# Altium PCB PCB_MCH_mordovia.PcbDoc
Units mil, origin at the board's own origin, x right, y up, seen from the top; angles counter-clockwise.
Board outline 2362.2 x 2759.84 mil, 4 copper layers (Top Layer, InternalPlane1, InternalPlane4, Bottom Layer), stack 28.032 mil thick; 8 components, 128 nets, 235 pads, 27 vias.
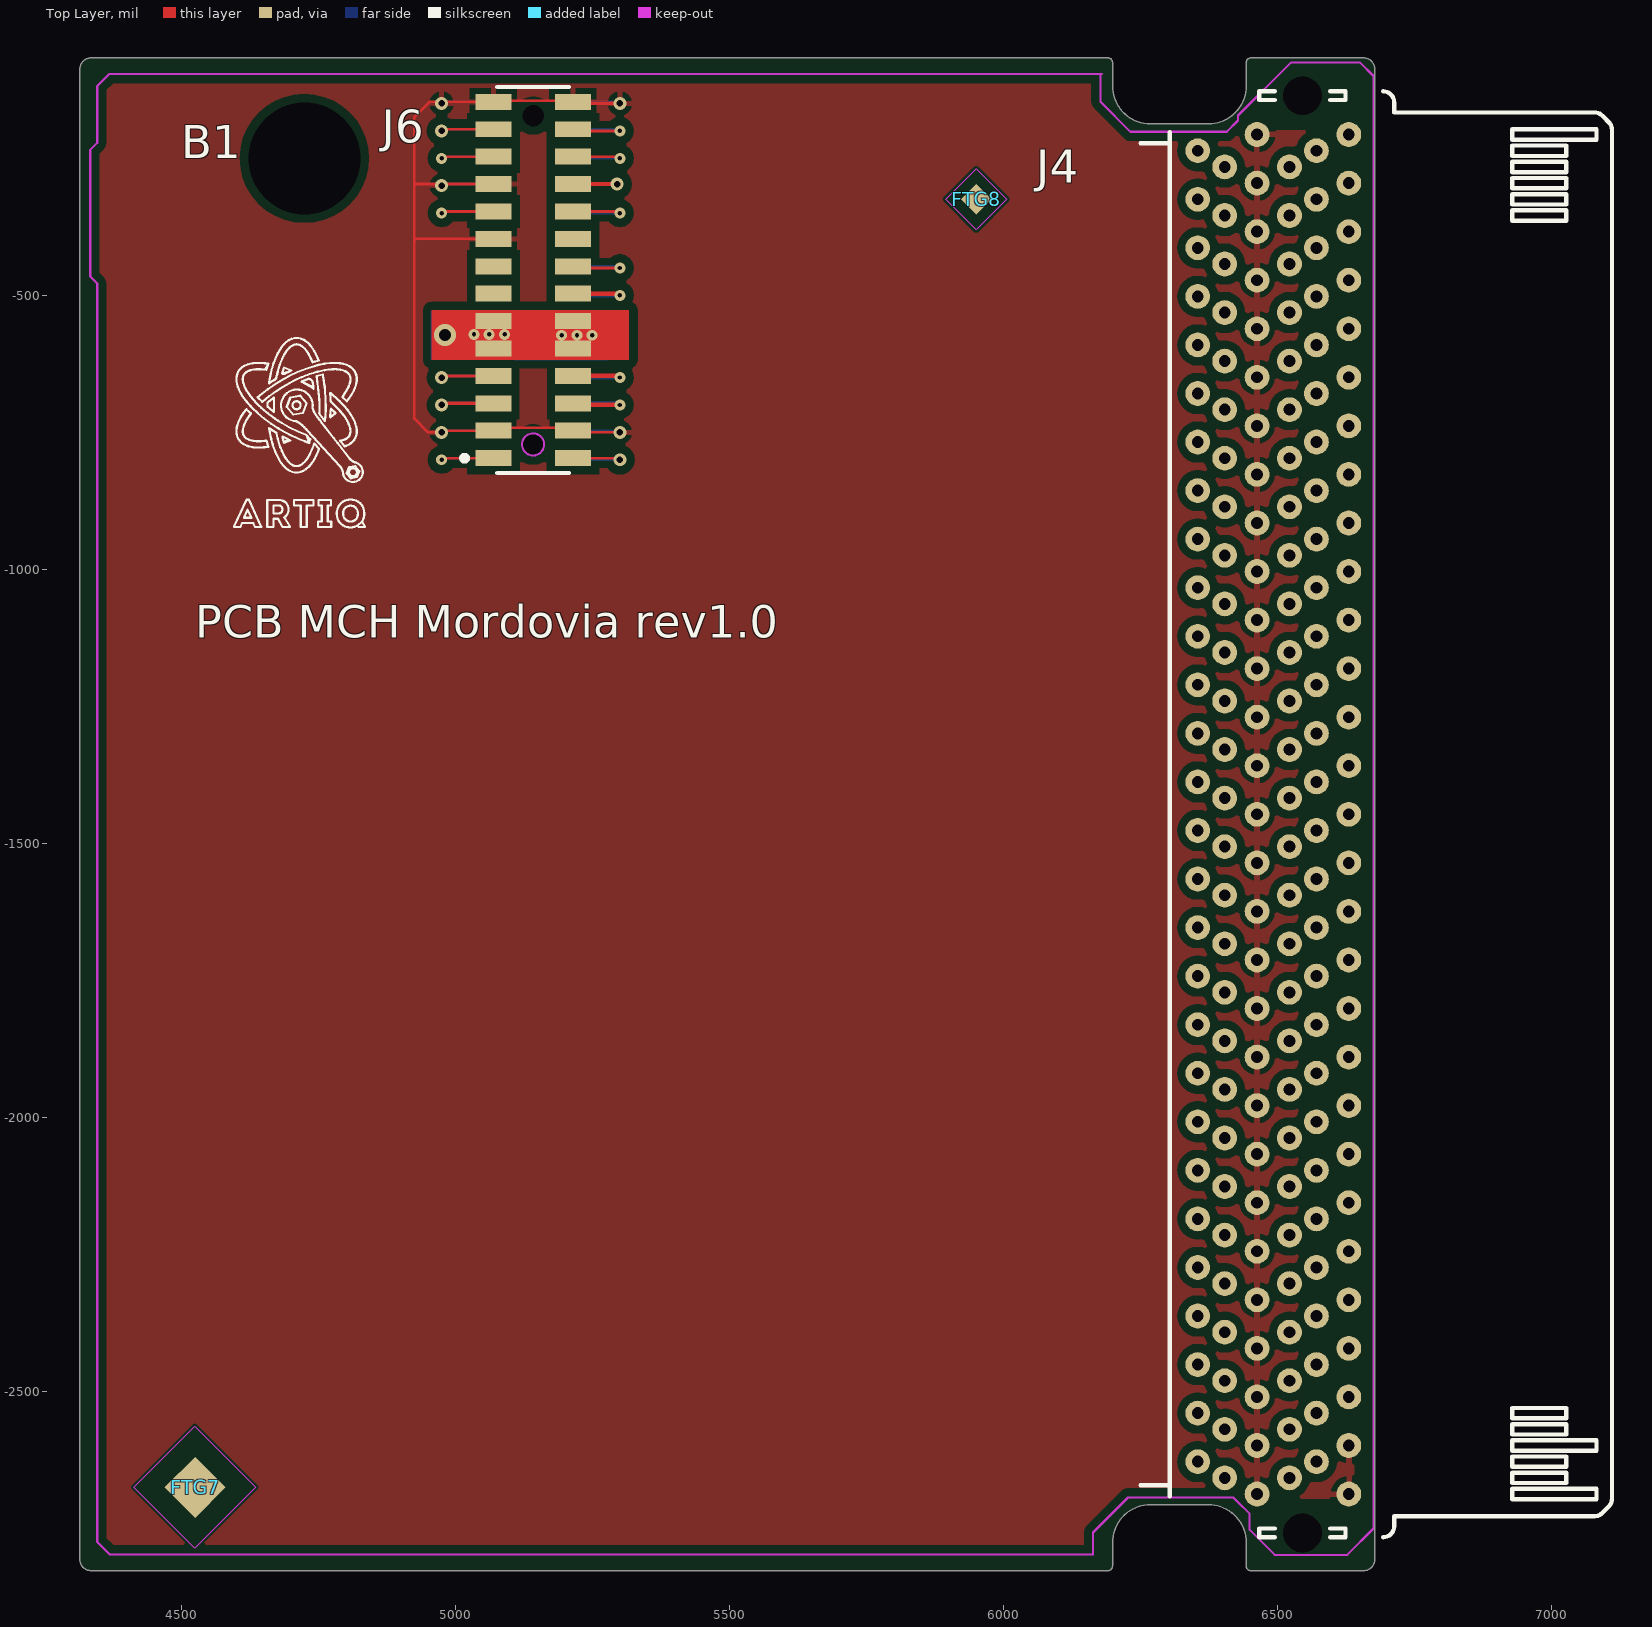
[diagram p0: Top Layer view]
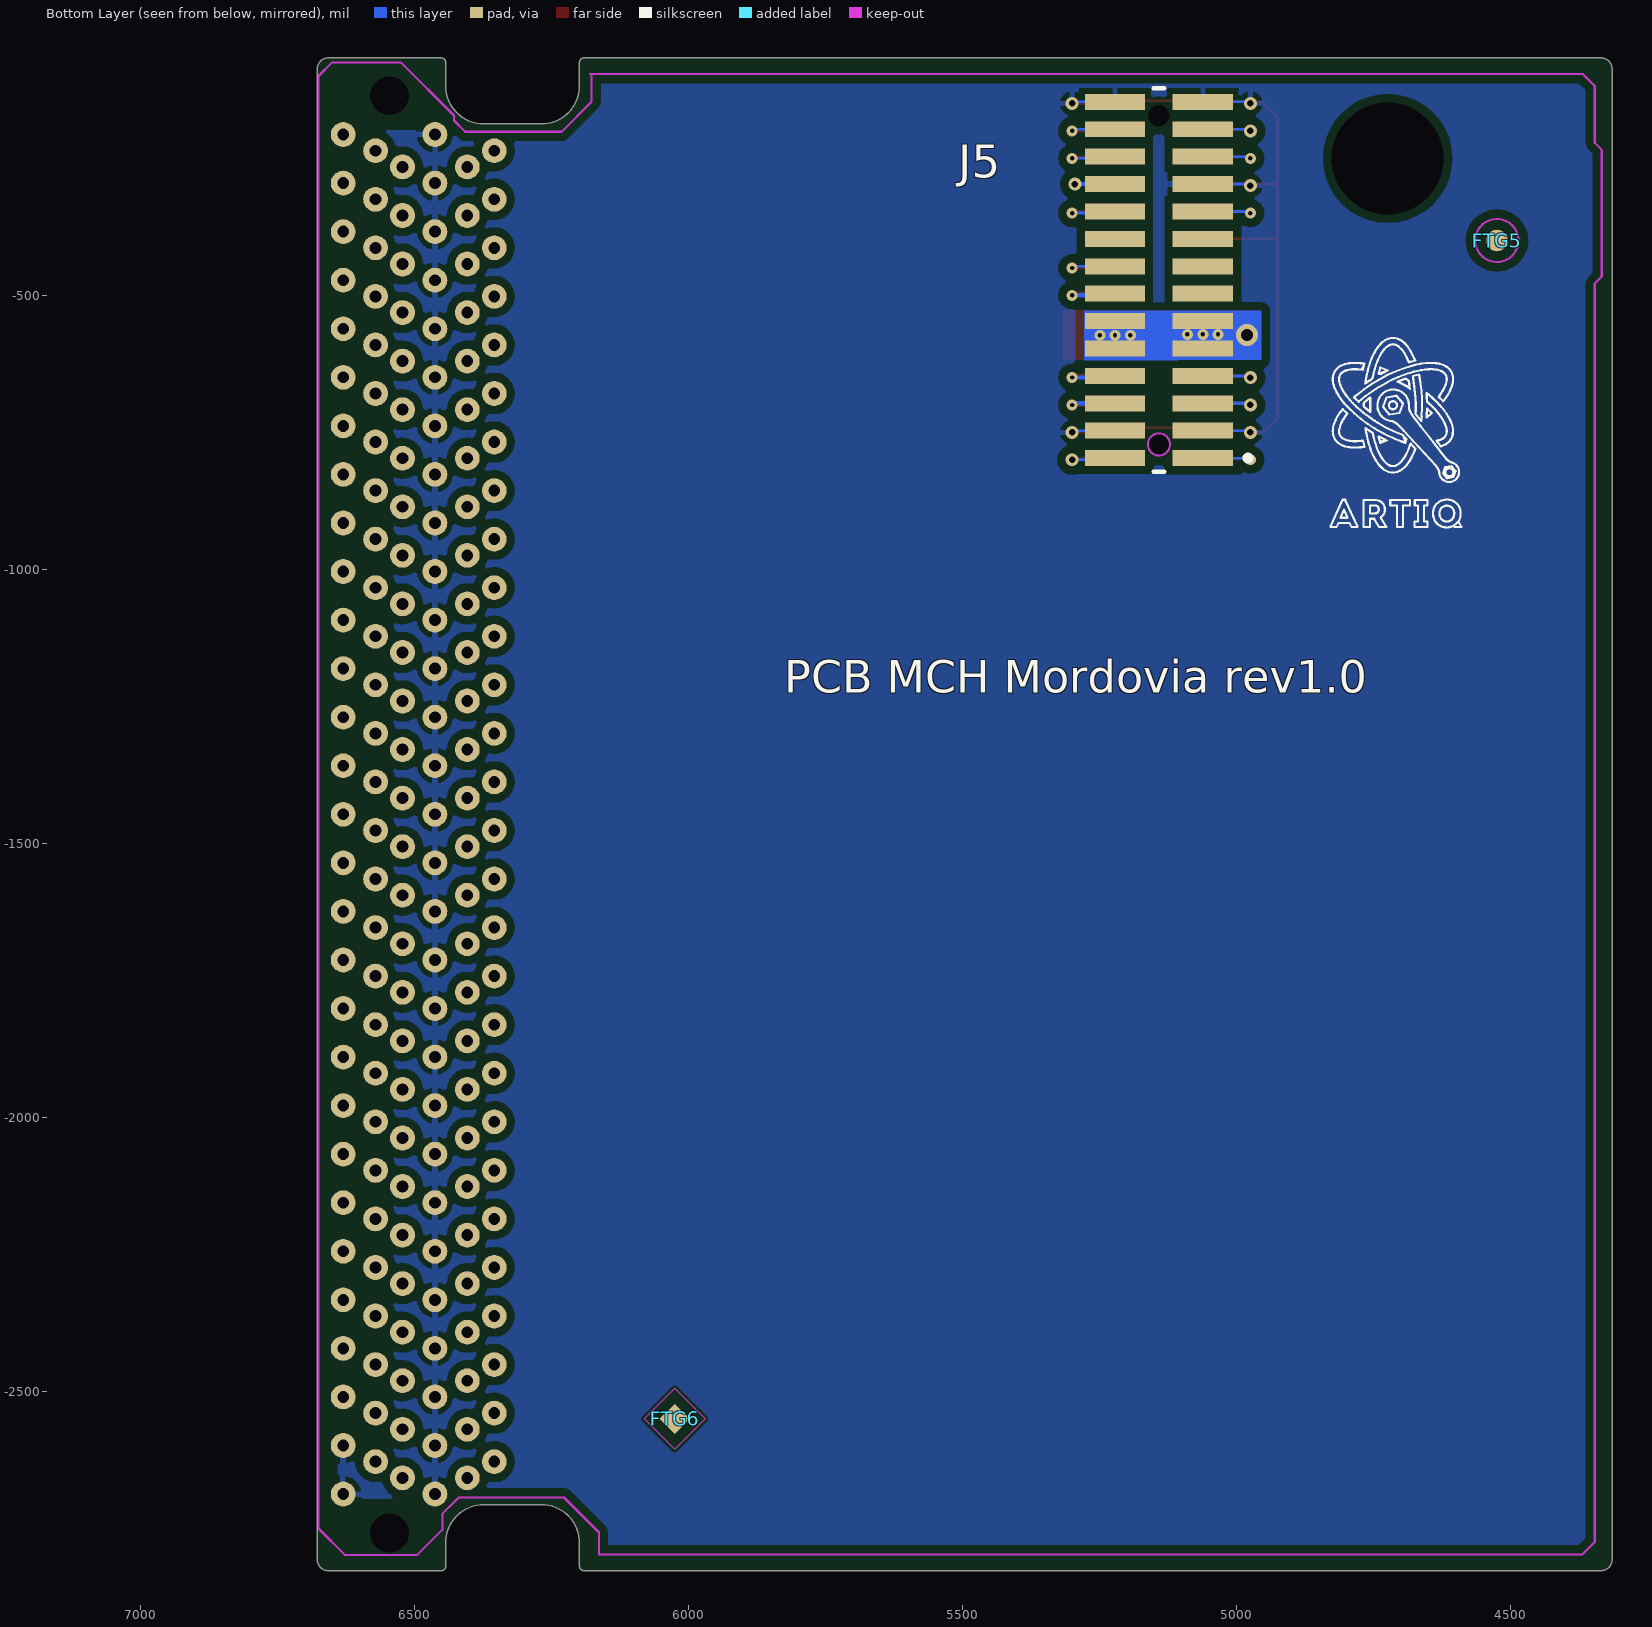
[diagram p1: Bottom Layer view, seen from below]
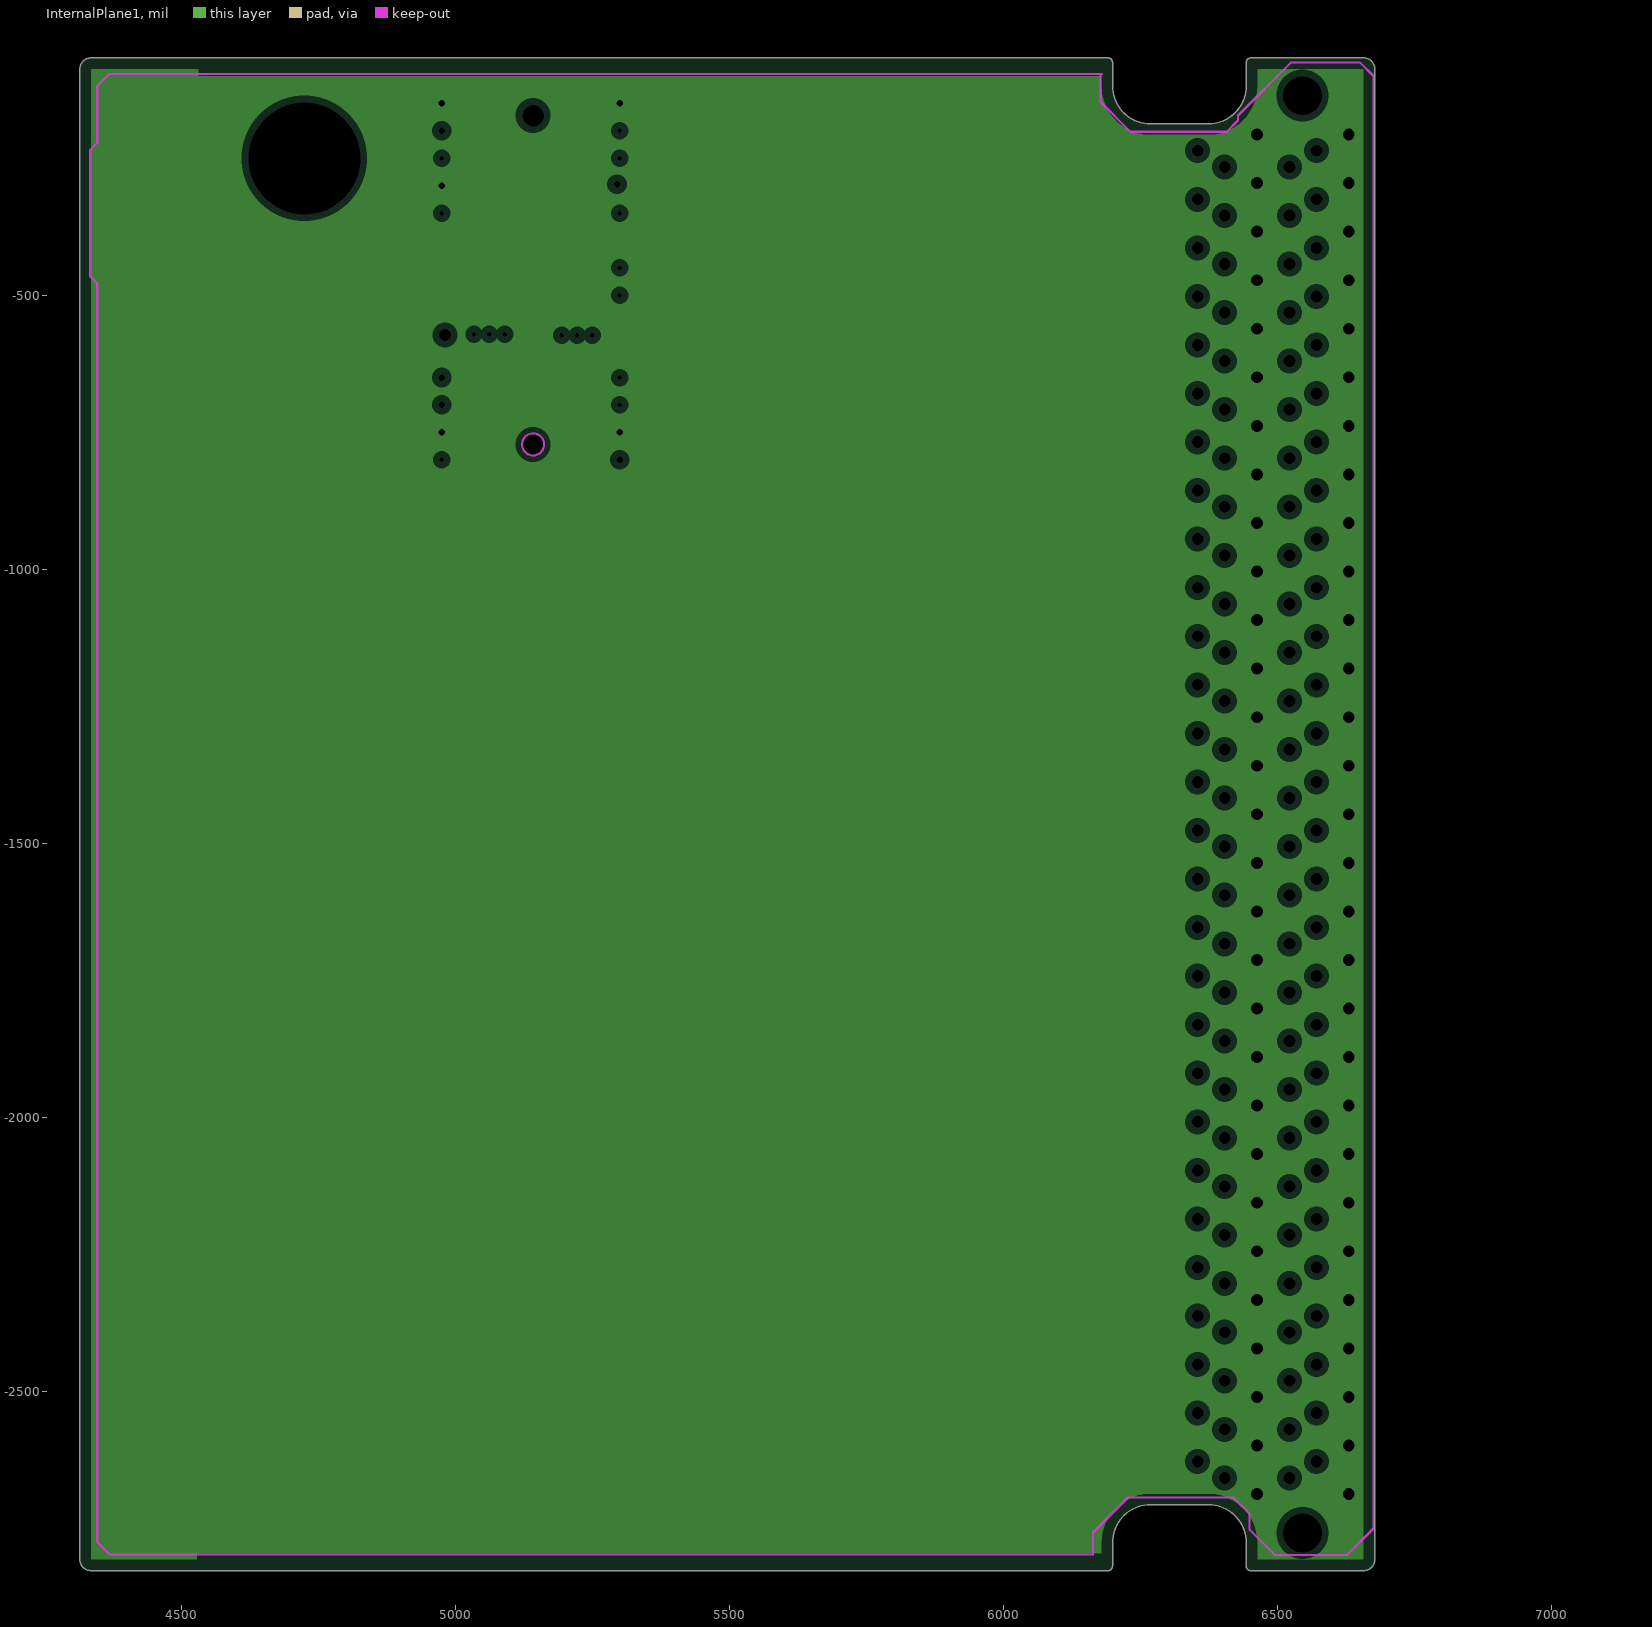
[diagram p2: InternalPlane1, clearances drawn from the general rule]
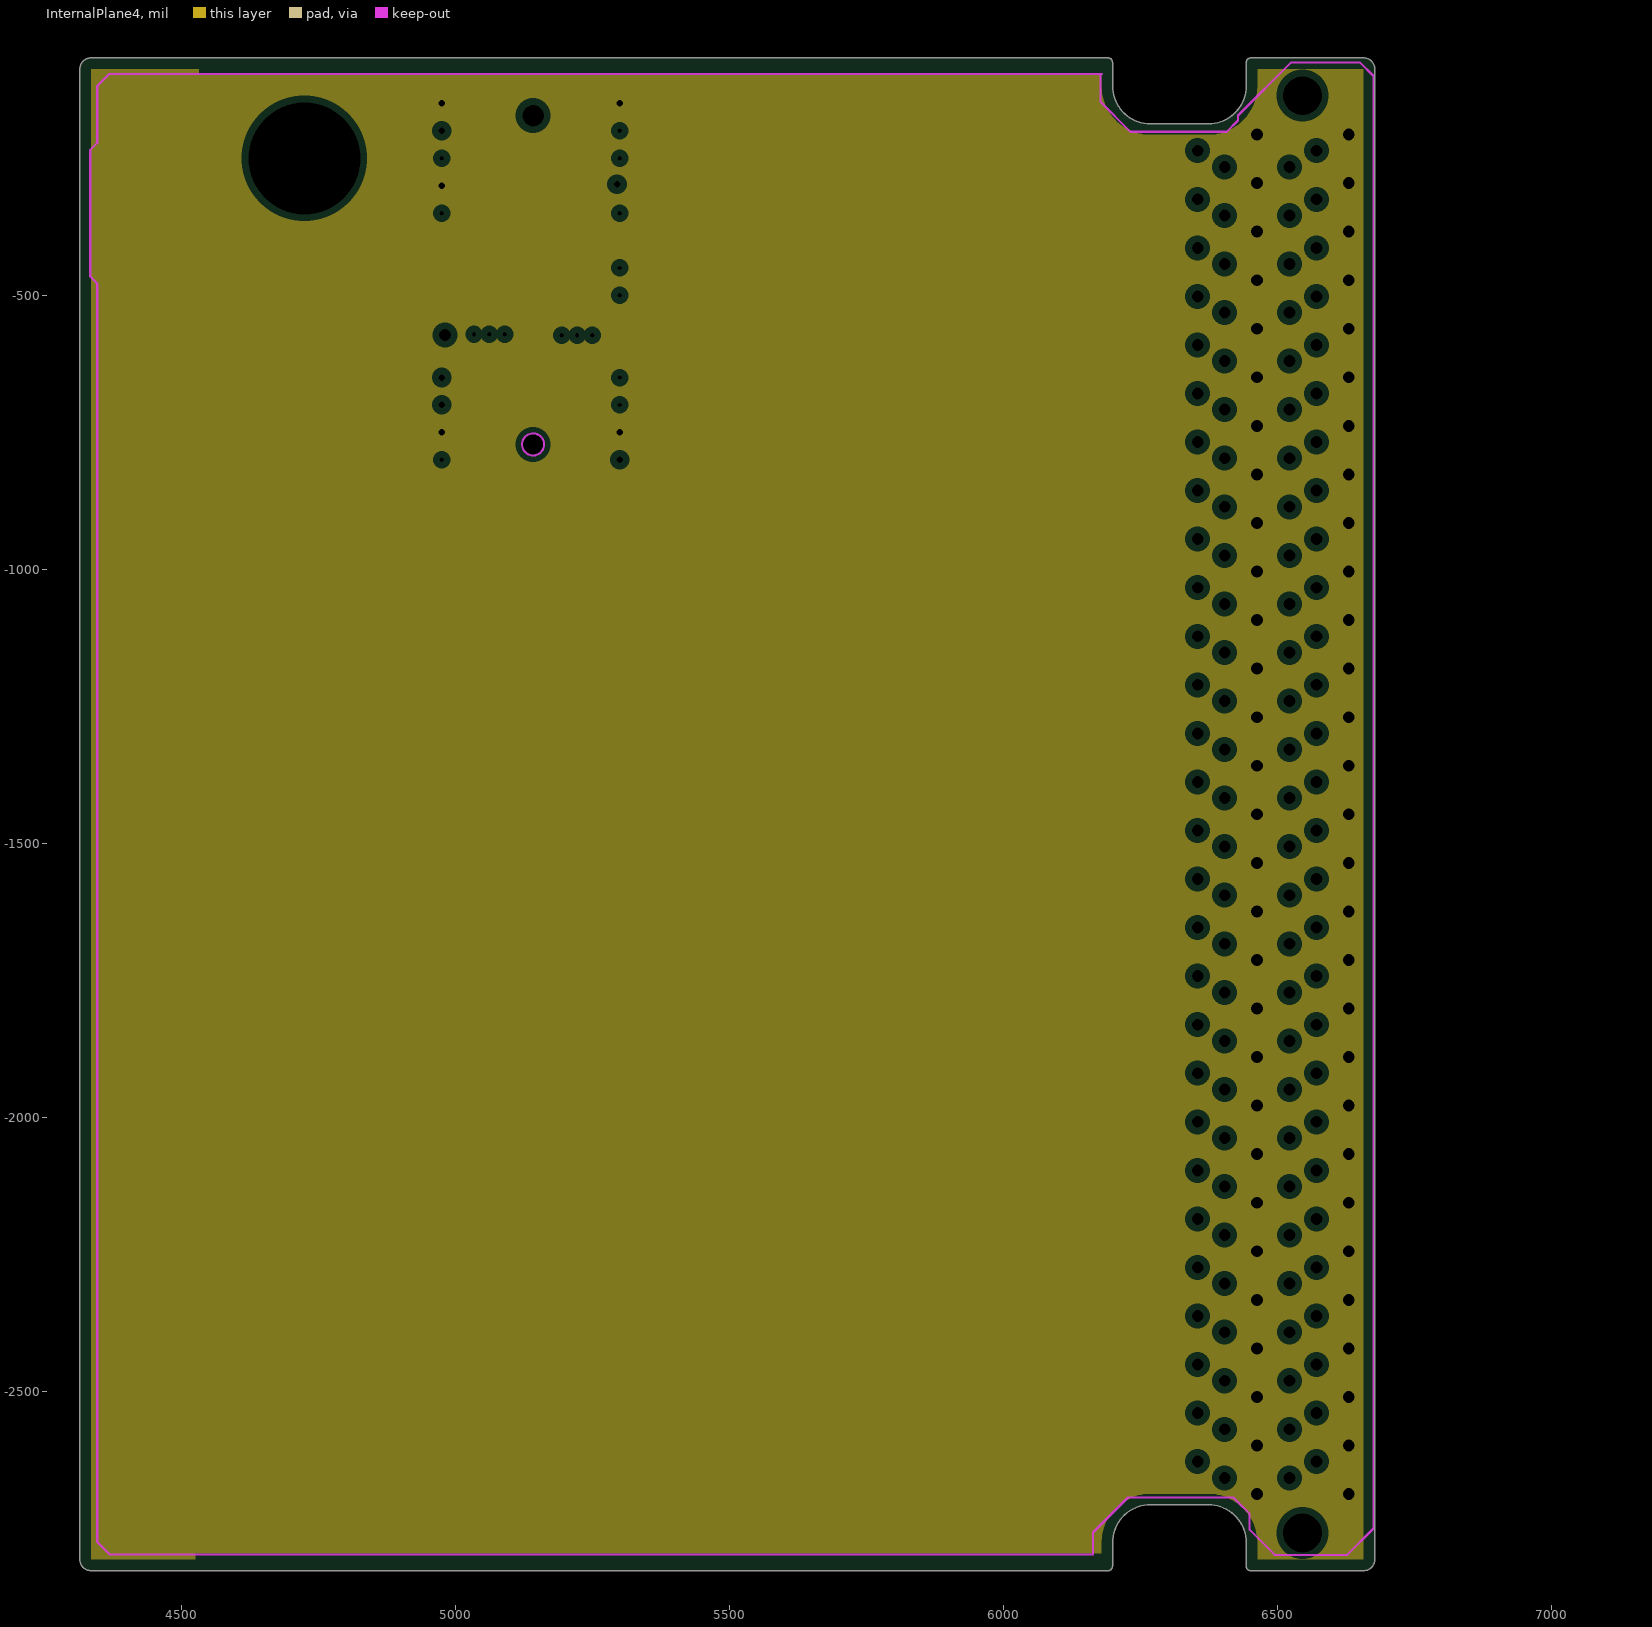
[diagram p3: InternalPlane4, clearances drawn from the general rule]

## Layer stack, top to bottom
Top Solder: solder mask 0.4, Solder Resist, Dk 3.5
Top Layer: signal copper 1.378
Dielectric1: core 9.2913, FR-4, Dk 4.5
InternalPlane1: plane copper 1.378, net GND
Dielectric5: prepreg 3.937, FR-4, Dk 4.5
InternalPlane4: plane copper 1.378, net GND
Dielectric6: core 9.2913, FR-4, Dk 4.8
Bottom Layer: signal copper 1.378
Bottom Solder: solder mask 0.4, Solder Resist, Dk 3.5

## Board outline
4334.65,-2826.77 6190.94,-2826.77 ccw(c6190.94,-2818.9) 6198.82,-2818.9 6198.82,-2775.59 cw(c6267.72,-2775.59) 6267.72,-2706.69 6374.02,-2706.69 cw(c6374.02,-2775.59) 6442.91,-2775.59 6442.91,-2818.9 ccw(c6450.79,-2818.9) 6450.79,-2826.77 6657.48,-2826.77 ccw(c6657.48,-2807.09) 6677.17,-2807.09 6677.17,-86.61 ccw(c6657.48,-86.61) 6657.48,-66.93 6450.79,-66.93 ccw(c6450.79,-74.8) 6442.91,-74.8 6442.91,-118.11 cw(c6374.02,-118.11) 6374.02,-187.01 6267.72,-187.01 cw(c6267.72,-118.11) 6198.82,-118.11 6198.83,-74.8 6198.82,-74.8 ccw(c6190.94,-74.8) 6190.94,-66.93 4334.65,-66.93 ccw(c4334.65,-86.61) 4314.96,-86.61 4314.96,-2807.09 ccw(c4334.65,-2807.09)

## Design rules (kind name [scope] priority, off if disabled: settings)
Clearance Clearance_Diff [InNetClass('diff_all') vs InNetClass('diff_all')] p1: gap=4.13
Clearance [All] p2: gap=5 except(15: Arc-Poly Track-Poly SMDPad-Poly THPad-Poly Via-Poly Fill-Poly Poly-Poly)
ComponentClearance [All] p1 off: gap=10 collisioncheckmode=3 verticalgap=10 showdistances=FALSE
DiffPairsRouting [IsDifferentialPair] p1: maxlimit=4.13 minlimit=4.13 mostfreqgap=4.13 toplayer_minwidth=15 toplayer_maxwidth=15 toplayer_prefwidth=15 bottomlayer_minwidth=15 bottomlayer_maxwidth=15 bottomlayer_prefwidth=15 maxuncoupledlength=900
FabricationTestPointUsage TestPointUsage [All] p1 off: valid=0 allowmultiple=FALSE
FabricationTestpoint Testpoint [All] p1 off: side=3 testpointundercomponent=TRUE minsize=40 maxsize=100 preferedsize=60 minholesize=0 maxholesize=40 preferedholesize=32 testpointgrid=1 allowsidetop=TRUE allowsidebottom=TRUE usegrid=TRUE gridtolerance=0.01
HoleSize [All] p1: absolutevalues=TRUE maxlimit=196.85 minlimit=7.87 maxpercent=80.000 minpercent=20.000
PlaneClearance PlaneClearance_CON1 [InComponent('CON1')] p1: clearance=15
PlaneClearance PlaneClearance_Via20mil [((viasize < 21) and (viasize > 19))] p2: clearance=10
PlaneClearance [All] p3: clearance=12
PlaneConnect PlaneConnect_CON1 [InComponent('CON1')] p1: planeconnectstyle=Relief reliefexpansion=10 reliefentries=4 reliefconductorwidth=8 reliefairgap=8
PlaneConnect PlaneConnect_Via26mil [((viasize < 27) and (viasize > 25))] p2: planeconnectstyle=Relief reliefexpansion=8 reliefentries=4 reliefconductorwidth=6 reliefairgap=5
PlaneConnect PlaneConnect_Via40mil [viasize=40] p3: planeconnectstyle=Direct reliefexpansion=20 reliefentries=4 reliefconductorwidth=10 reliefairgap=10
PlaneConnect PlaneConnect_Via20mil [((viasize < 21) and (viasize > 19))] p4: planeconnectstyle=Relief reliefexpansion=7 reliefentries=4 reliefconductorwidth=6 reliefairgap=5
PlaneConnect [All] p5: planeconnectstyle=Relief reliefexpansion=15 reliefentries=4 reliefconductorwidth=10 reliefairgap=10
PolygonConnect PolygonConnect_Power [InNetClass('Power')] p1: connectstyle=Direct reliefconductorwidth=10 reliefentries=4 polygonreliefangle="90 Angle" airgapwidth=10
PolygonConnect [All] p2: connectstyle=Relief reliefconductorwidth=10 reliefentries=4 polygonreliefangle="90 Angle" airgapwidth=10
RoomDefinition PCB_MCH_mordovia [InComponentClass('PCB_MCH_mordovia')] p1: confinementstyle=ConfineIn formatcopy=TRUE lockcomponents=FALSE outline 4609.7,-2119 4429,-2119 4429,-2661 4609.7,-2661
RoutingVias [All] p1: holewidth=7.87 width=20 viastyle="Through Hole" minholewidth=7.87 minwidth=20 maxholewidth=23.62 maxwidth=50
SilkToSolderMaskClearance SilkscreenOverComponentPads [IsPad] p1: minsilkscreentomaskgap=10 clearancetoexposedcopper=TRUE
SolderMaskExpansion SolderMaskExpansion_Via [(IsVia)] p1: expansion=-10
SolderMaskExpansion [All] p2: expansion=4
Width Width_PWR [InNetClass('power')] p1: maxlimit=60 minlimit=8 preferedwidth=10
Width Width_diff [InNetClass('diff_all')] p2: maxlimit=4.92 minlimit=4.92 preferedwidth=4.92 minimp=50.000000 maximp=50.000000 favimp=50.000000
Width [All] p3: maxlimit=60 minlimit=4.92 preferedwidth=5 minimp=50.000000 maximp=50.000000 favimp=50.000000
22 further rules are at their usual default settings.

## Components (designator, comment, footprint, x,y, rotation, side; value= is the part's Value field where it differs from the comment)
B1 "Non Plated Hole" MTG520 4724.41,-250.2 r0 top
FTG5 "Use only in PCB" FIDUCIAL_TOP_C100-200 4525,-400 r90 bottom
FTG6 "Use only in PCB" FIDUCIAL_TOP_S100-200 6025,-2550 r90 bottom
FTG7 "Use only in PCB" FIDUCIAL_TOP_S200-400 4525,-2675 r0 top
FTG8 "Use only in PCB" FIDUCIAL_TOP_S100-200 5950,-325 r90 top
J4 "Familly" ITB_16241701301000 6545.28,-1446.85 r90 top
J5 "Header 28" SAMTEC_FTS-114-02-L-DV-A 5141.73,-472.05 r90 bottom
J6 "Socket 28" SAMTEC_FLE-114-01-G-DV 5141.74,-472.05 r90 top

## Footprints (in the part's own frame and the unit in brackets; to place one, negate y for a bottom-side part, rotate by r counter-clockwise, add the part's x,y. Pads: shape width x height; smd on the part's side, far side on the other; paste and mask are expansions set on the pad)
FIDUCIAL_TOP_C100-200 [mm] "Round Fiducial Target, Top Layer, 1.0mm, Top Solder 2.0mm, Keepout =2.0mm"
  round 1 smd paste-0.51 mask+0.5: FTG2(0,0)
  Top Layer keep-out circle w0.1: c0,0 r1
FIDUCIAL_TOP_S100-200 [mm] "Square Fiducial Target, Top Layer, 1.0mm, Top Solder 2.0mm, Keepout =2.0mm"
  rect 1x1 smd rot 45 paste-0.51 mask+0.5: 1(0,0)
  Top Layer keep-out region: 1.414,0 0,-1.414 -1.414,0 0,1.414
FIDUCIAL_TOP_S200-400 [mm] "Square Fiducial Target, Top Layer, 2.0mm, Top Solder 4.0mm, Keepout =4.0mm"
  rect 2x2 smd rot 45 paste-0.9 mask+1: 1(0,0)
  Top Layer keep-out region: -2.839,0.011 -0.011,2.839 2.818,0.011 -0.011,-2.818
ITB_16241701301000 [mm] "170 Poles, MCH-Plug Connector (Basic Side)"
  round 1.15 hole 0.55: 1(31.5,2.1) 2(30.75,4.85) 3(30,3.6) 4(29.25,2.1) 5(28.5,4.85) 6(27.75,3.6) 7(27,2.1) 8(26.25,4.85) 9(25.5,3.6) 10(24.75,2.1) 11(24,4.85) 12(23.25,3.6) 13(22.5,2.1) 14(21.75,4.85) 15(21,3.6) 16(20.25,2.1) 17(19.5,4.85) 18(18.75,3.6) 19(18,2.1) 20(17.25,4.85) 21(16.5,3.6) 22(15.75,2.1) 23(15,4.85) 24(14.25,3.6) 25(13.5,2.1) 26(12.75,4.85) 27(12,3.6) 28(11.25,2.1) 29(10.5,4.85) 30(9.75,3.6) 31(9,2.1) 32(8.25,4.85) 33(7.5,3.6) 34(6.75,2.1) 35(6,4.85) 36(5.25,3.6) 37(4.5,2.1) 38(3.75,4.85) 39(3,3.6) 40(2.25,2.1) 41(1.5,4.85) 42(0.75,3.6) 43(0,2.1) 44(-0.75,4.85) 45(-1.5,3.6) 46(-2.25,2.1) 47(-3,4.85) 48(-3.75,3.6) 49(-4.5,2.1) 50(-5.25,4.85) 51(-6,3.6) 52(-6.75,2.1) 53(-7.5,4.85) 54(-8.25,3.6) 55(-9,2.1) 56(-9.75,4.85) 57(-10.5,3.6) 58(-11.25,2.1) 59(-12,4.85) 60(-12.75,3.6) 61(-13.5,2.1) 62(-14.25,4.85) 63(-15,3.6) 64(-15.75,2.1) 65(-16.5,4.85) 66(-17.25,3.6) 67(-18,2.1) 68(-18.75,4.85) 69(-19.5,3.6) 70(-20.25,2.1) 71(-21,4.85) 72(-21.75,3.6) 73(-22.5,2.1) 74(-23.25,4.85) 75(-24,3.6) 76(-24.75,2.1) 77(-25.5,4.85) 78(-26.25,3.6) 79(-27,2.1) 80(-27.75,4.85) 81(-28.5,3.6) 82(-29.25,2.1) 83(-30,4.85) 84(-30.75,3.6) 85(-31.5,2.1) 86(-31.5,-2.15) 87(-30.75,0.6) 88(-30,-0.65) 89(-29.25,-2.15) 90(-28.5,0.6) 91(-27.75,-0.65) 92(-27,-2.15) 93(-26.25,0.6) 94(-25.5,-0.65) 95(-24.75,-2.15) 96(-24,0.6) 97(-23.25,-0.65) 98(-22.5,-2.15) 99(-21.75,0.6) 100(-21,-0.65) 101(-20.25,-2.15) 102(-19.5,0.6) 103(-18.75,-0.65) 104(-18,-2.15) 105(-17.25,0.6) 106(-16.5,-0.65) 107(-15.75,-2.15) 108(-15,0.6) 109(-14.25,-0.65) 110(-13.5,-2.15) 111(-12.75,0.6) 112(-12,-0.65) 113(-11.25,-2.15) 114(-10.5,0.6) 115(-9.75,-0.65) 116(-9,-2.15) 117(-8.25,0.6) 118(-7.5,-0.65) 119(-6.75,-2.15) 120(-6,0.6) 121(-5.25,-0.65) 122(-4.5,-2.15) 123(-3.75,0.6) 124(-3,-0.65) 125(-2.25,-2.15) 126(-1.5,0.6) 127(-0.75,-0.65) 128(0,-2.15) 129(0.75,0.6) 130(1.5,-0.65) 131(2.25,-2.15) 132(3,0.6) 133(3.75,-0.65) 134(4.5,-2.15) 135(5.25,0.6) 136(6,-0.65) 137(6.75,-2.15) 138(7.5,0.6) 139(8.25,-0.65) 140(9,-2.15) 141(9.75,0.6) 142(10.5,-0.65) 143(11.25,-2.15) 144(12,0.6) 145(12.75,-0.65) 146(13.5,-2.15) 147(14.25,0.6) 148(15,-0.65) 149(15.75,-2.15) 150(16.5,0.6) 151(17.25,-0.65) 152(18,-2.15) 153(18.75,0.6) 154(19.5,-0.65) 155(20.25,-2.15) 156(21,0.6) 157(21.75,-0.65) 158(22.5,-2.15) 159(23.25,0.6) 160(24,-0.65) 161(24.75,-2.15) 162(25.5,0.6) 163(26.25,-0.65) 164(27,-2.15) 165(27.75,0.6) 166(28.5,-0.65) 167(29.25,-2.15) 168(30,0.6) 169(30.75,-0.65) 170(31.5,-2.15)
  round 1 hole 1.8 unplated mask+0.4: 171(-33.3,0) 172(33.3,0)
  silkscreen extent -33.5,-14.35 33.5,7.5, body extent -34.95,-14.35 34.95,8.65, height 3.42
MTG520 [mm] "Non Plated Through Hole: Hole Dia.=5.2mm"
  round 1 hole 5.2 unplated mask+2.1: 1(0,0)
SAMTEC_FLE-114-01-G-DV [mm] "28 Contacts - Pitch 1.27mm - Top Entry, Dual Row Surface Mount Receptacle"
  rect 0.74x1.675 smd: 1(-8.255,1.843) 2(-8.255,-1.843) 3(-6.985,1.843) 4(-6.985,-1.843) 5(-5.715,1.843) 6(-5.715,-1.843) 7(-4.445,1.843) 8(-4.445,-1.843) 9(-3.175,1.843) 10(-3.175,-1.843) 11(-1.905,1.843) 12(-1.905,-1.843) 13(-0.635,1.843) 14(-0.635,-1.843) 15(0.635,1.843) 16(0.635,-1.843) 17(1.905,1.843) 18(1.905,-1.843) 19(3.175,1.843) 20(3.175,-1.843) 21(4.445,1.843) 22(4.445,-1.843) 23(5.715,1.843) 24(5.715,-1.843) 25(6.985,1.843) 26(6.985,-1.843) 27(8.255,1.843) 28(8.255,-1.843)
  silkscreen extent -8.95,-1.67 8.95,3.3, body extent -8.94,-2.3 8.95,2.3, height 4.55
SAMTEC_FTS-114-02-L-DV-A [mm] "28 Contacts, Pitch 1.27mm - Dual Row Surface Mount Straight Strip Header"
  rect 0.74x2.79 smd: 1(-8.255,-2.035) 2(-8.255,2.035) 3(-6.985,-2.035) 4(-6.985,2.035) 5(-5.715,-2.035) 6(-5.715,2.035) 7(-4.445,-2.035) 8(-4.445,2.035) 9(-3.175,-2.035) 10(-3.175,2.035) 11(-1.905,-2.035) 12(-1.905,2.035) 13(-0.635,-2.035) 14(-0.635,2.035) 15(0.635,-2.035) 16(0.635,2.035) 17(1.905,-2.035) 18(1.905,2.035) 19(3.175,-2.035) 20(3.175,2.035) 21(4.445,-2.035) 22(4.445,2.035) 23(5.715,-2.035) 24(5.715,2.035) 25(6.985,-2.035) 26(6.985,2.035) 27(8.255,-2.035) 28(8.255,2.035)
  round 0.5 hole 1 unplated mask+0.1: 29(-7.62,0) 30(7.62,0)
  silkscreen extent -8.89,-4.25 8.89,0.25, body extent -8.89,-2.92 8.89,2.92, height 3.17

## Part data
B1: library part NON-PLATED_HOLE5.2, "Single Terminal Socket"
FTG5: library part FIDUCIAL_TARGET_C100-200, "Fiducial Target"
FTG6 FTG8: library part FIDUCIAL_TARGET_S100-200, "Fiducial Target"
FTG7: library part FIDUCIAL_TARGET_S200-400, "Fiducial Target"
J4: library part ITB_16241701301000, "Connector 170 Male"
J5: library part SAMTEC_FTS-114-02-L-DV-A, "Connector 28 Male"
J6: library part SAMTEC_FLE-114-01-G-DV, "Connector 28 Female"

## Via types
v1: diameter 20, hole 7.87, Top Layer to Bottom Layer, tented both sides, 16 vias
v2: diameter 23.62, hole 11.81, Top Layer to Bottom Layer, tented both sides, 10 vias
v3: diameter 40, hole 21.65, Top Layer to Bottom Layer, 1 vias

## Nets (pads, with @x,y where several pads share a name; then routed paths per layer and width w, separated by ;. In a path a pad name is that pad's centre, name@x,y a point inside that pad or via, vN(x,y) a via of type N, cw(c..) or ccw(c..) an arc to the next point about the centre after c; other vN are vias at no path point)
+3.3V_IPMI: J5.14 J6.14 | length 166.3
  Top Layer w8: J6.14 5297.05,-497.05 v1(5300,-500)
  Bottom Layer w8: J5.14 5224.8,-500 v1(5300,-500)
/SPISEL_CLKPCB: J5.1 J6.1 | length 183.3
  Top Layer w5: v1(4975,-800) 4977.95,-797.05 J6.1
  Bottom Layer w5: v1(4975,-800) 4977.95,-797.05 J5.1
/SPISEL_HUBPCB: J5.22 J6.22 | length 143.6
  Top Layer w7.87: J6.22 5294.65,-297.05 v2(5294.9,-297.3)
  Bottom Layer w7.87: J5.22 v2@5284.75,-297.05
BASE_RA_N: J5.6 J6.6 | length 166.3
  Top Layer w8: J6.6 5217.23,-700 v1(5300,-700)
  Bottom Layer w8: J5.6 5297.05,-697.05 v1(5300,-700)
BASE_RA_P: J5.8 J6.8 | length 166.3
  Top Layer w8: J6.8 5297.05,-647.05 v1(5300,-650)
  Bottom Layer w8: J5.8 5224.8,-650 v1(5300,-650)
BASE_TA_N: J5.5 J6.5 | length 183.3
  Top Layer w5.9: v2(4975,-700) 4977.95,-697.05 J6.5
  Bottom Layer w5.9: v2(4975,-700) 4977.95,-697.05 J5.5
BASE_TA_P: J5.7 J6.7 | length 183.3
  Top Layer w5.9: v2(4975,-650) 4977.95,-647.05 J6.7
  Bottom Layer w5.9: v2(4975,-650) 4977.95,-647.05 J5.7
CLK1-1_N: J4.51
CLK1-1_P: J4.50 | length 49.2
  Top Layer w4.92: J4.50@6354.33,-1653.81 6354.33,-1661.68 6359.25,-1666.61 6369.09,-1656.76 6369.09,-1649.87 6361.22,-1642 J4.50@6358.79,-1642
CLK1-2_N: J4.54
CLK1-2_P: J4.53 | length 49.2
  Top Layer w4.92: J4.53@6354.33,-1742.39 6354.33,-1750.27 6359.25,-1755.19 6369.09,-1745.35 6369.09,-1738.46 6361.22,-1730.58 J4.53@6358.79,-1730.58
CLK1-3_N: J4.57
CLK1-3_P: J4.56 | length 49.2
  Top Layer w4.92: J4.56@6354.33,-1830.98 6354.33,-1838.85 6359.25,-1843.77 6369.09,-1833.93 6369.09,-1827.04 6361.22,-1819.17 J4.56@6358.79,-1819.17
CLK1-4_N: J4.60
CLK1-4_P: J4.59 | length 49.2
  Top Layer w4.92: J4.59@6354.33,-1919.56 6354.33,-1927.43 6359.25,-1932.35 6369.09,-1922.51 6369.09,-1915.62 6361.22,-1907.75 J4.59@6358.79,-1907.75
CLK1-5_N: J4.63
CLK1-5_P: J4.62 | length 49.2
  Top Layer w4.92: J4.62@6354.33,-2008.14 6354.33,-2016.02 6359.25,-2020.94 6369.09,-2011.09 6369.09,-2004.2 6361.22,-1996.33 J4.62@6358.79,-1996.33
CLK1-6_N: J4.66
CLK1-6_P: J4.65 | length 49.2
  Top Layer w4.92: J4.65@6354.33,-2096.72 6354.33,-2104.6 6359.25,-2109.52 6369.09,-2099.68 6369.09,-2092.79 6361.22,-2084.91 J4.65@6358.79,-2084.91
CLK1-7_N: J4.69
CLK1-7_P: J4.68 | length 49.2
  Top Layer w4.92: J4.68@6354.33,-2185.31 6354.33,-2193.18 6359.25,-2198.1 6369.09,-2188.26 6369.09,-2181.37 6361.22,-2173.5 J4.68@6358.79,-2173.5
CLK1-8_N: J4.72
CLK1-8_P: J4.71 | length 49.2
  Top Layer w4.92: J4.71@6354.33,-2273.89 6354.33,-2281.76 6359.25,-2286.68 6369.09,-2276.84 6369.09,-2269.95 6361.22,-2262.08 J4.71@6358.79,-2262.08
CLK1-9_N: J4.75
CLK1-9_P: J4.74 | length 49.2
  Top Layer w4.92: J4.74@6354.33,-2362.47 6354.33,-2370.35 6359.25,-2375.27 6369.09,-2365.43 6369.09,-2358.54 6361.22,-2350.66 J4.74@6358.79,-2350.66
CLK1-10_N: J4.78
CLK1-10_P: J4.77 | length 49.2
  Top Layer w4.92: J4.77@6354.33,-2451.05 6354.33,-2458.93 6359.25,-2463.85 6369.09,-2454.01 6369.09,-2447.12 6361.22,-2439.24 J4.77@6358.79,-2439.24
CLK1-11_N: J4.81
CLK1-11_P: J4.80 | length 49.2
  Top Layer w4.92: J4.80@6354.33,-2539.65 6354.33,-2547.52 6359.25,-2552.44 6369.09,-2542.6 6369.09,-2535.71 6361.22,-2527.83 J4.80@6358.79,-2527.83
CLK1-12_N: J4.84
CLK1-12_P: J4.83 | length 49.2
  Top Layer w4.92: J4.83 6354.33,-2635.83 6359.25,-2640.75 6369.09,-2630.91 6369.09,-2624.02 6361.22,-2616.14 J4.83@6358.79,-2616.14
CLK1-RX_N: J4.159 | length 49.2
  Bottom Layer w4.92: J4.159 6521.65,-539.37 6526.57,-544.29 6536.42,-534.45 6536.42,-527.56 6528.54,-519.69 J4.159@6526.11,-519.69
CLK1-RX_P: J4.160
CLK1-TX_N: J4.12
CLK1-TX_P: J4.11 | length 49.2
  Bottom Layer w4.92: J4.11@6354.33,-502.24 6354.33,-510.11 6359.25,-515.03 6369.09,-505.19 6369.09,-498.3 6361.22,-490.43 J4.11@6358.79,-490.43
CLK2-1_N: J4.120 | length 49.2
  Bottom Layer w4.92: J4.120 6521.65,-1690.94 6526.57,-1695.87 6536.42,-1686.02 6536.42,-1679.13 6528.54,-1671.26 J4.120@6526.11,-1671.26
CLK2-1_P: J4.121
CLK2-2_N: J4.117 | length 49.2
  Bottom Layer w4.92: J4.117 6521.65,-1779.53 6526.57,-1784.45 6536.42,-1774.61 6536.42,-1767.72 6528.54,-1759.84 J4.117@6526.11,-1759.84
CLK2-2_P: J4.118
CLK2-3_N: J4.114 | length 49.2
  Bottom Layer w4.92: J4.114 6521.65,-1868.11 6526.57,-1873.03 6536.42,-1863.19 6536.42,-1856.3 6528.54,-1848.43 J4.114@6526.11,-1848.43
CLK2-3_P: J4.115
CLK2-4_N: J4.111 | length 49.2
  Bottom Layer w4.92: J4.111 6521.65,-1956.69 6526.57,-1961.61 6536.42,-1951.77 6536.42,-1944.88 6528.54,-1937.01 J4.111@6526.11,-1937.01
CLK2-4_P: J4.112
CLK2-5_N: J4.108 | length 49.2
  Bottom Layer w4.92: J4.108 6521.65,-2045.28 6526.57,-2050.2 6536.42,-2040.35 6536.42,-2033.46 6528.54,-2025.59 J4.108@6526.11,-2025.59
CLK2-5_P: J4.109
CLK2-6_N: J4.105 | length 49.2
  Bottom Layer w4.92: J4.105 6521.65,-2133.86 6526.57,-2138.78 6536.42,-2128.94 6536.42,-2122.05 6528.54,-2114.17 J4.105@6526.11,-2114.17
CLK2-6_P: J4.106
CLK2-7_N: J4.102 | length 49.2
  Bottom Layer w4.92: J4.102 6521.65,-2222.44 6526.57,-2227.36 6536.42,-2217.52 6536.42,-2210.63 6528.54,-2202.76 J4.102@6526.11,-2202.76
CLK2-7_P: J4.103
CLK2-8_N: J4.99 | length 49.2
  Bottom Layer w4.92: J4.99 6521.65,-2311.02 6526.57,-2315.94 6536.42,-2306.1 6536.42,-2299.21 6528.54,-2291.34 J4.99@6526.11,-2291.34
CLK2-8_P: J4.100
CLK2-9_N: J4.96 | length 49.2
  Bottom Layer w4.92: J4.96 6521.65,-2399.61 6526.57,-2404.53 6536.42,-2394.69 6536.42,-2387.8 6528.54,-2379.92 J4.96@6526.11,-2379.92
CLK2-9_P: J4.97
CLK2-10_N: J4.93 | length 49.2
  Bottom Layer w4.92: J4.93 6521.65,-2488.19 6526.57,-2493.11 6536.42,-2483.27 6536.42,-2476.38 6528.54,-2468.5 J4.93@6526.11,-2468.5
CLK2-10_P: J4.94
CLK2-11_N: J4.90 | length 49.2
  Bottom Layer w4.92: J4.90 6521.65,-2576.77 6526.57,-2581.69 6536.42,-2571.85 6536.42,-2564.96 6528.54,-2557.09 J4.90@6526.11,-2557.09
CLK2-11_P: J4.91
CLK2-12_N: J4.87 | length 49.2
  Bottom Layer w4.92: J4.87 6521.65,-2665.35 6526.57,-2670.28 6536.42,-2660.43 6536.42,-2653.54 6528.54,-2645.67 J4.87@6526.11,-2645.67
CLK2-12_P: J4.88
CLK3-1_N: J4.33
CLK3-1_P: J4.32 | length 49.2
  Top Layer w4.92: J4.32@6354.33,-1122.31 6354.33,-1130.19 6359.25,-1135.11 6369.09,-1125.27 6369.09,-1118.38 6361.22,-1110.5 J4.32@6358.79,-1110.5
CLK3-2_N: J4.36
CLK3-2_P: J4.35 | length 49.2
  Top Layer w4.92: J4.35@6354.33,-1210.9 6354.33,-1218.77 6359.25,-1223.69 6369.09,-1213.85 6369.09,-1206.96 6361.22,-1199.09 J4.35@6358.79,-1199.09
CLK3-3_N: J4.39
CLK3-3_P: J4.38 | length 49.2
  Top Layer w4.92: J4.38@6354.33,-1299.48 6354.33,-1307.35 6359.25,-1312.28 6369.09,-1302.43 6369.09,-1295.54 6361.22,-1287.67 J4.38@6358.79,-1287.67
CLK3-4_N: J4.42
CLK3-4_P: J4.41 | length 49.2
  Top Layer w4.92: J4.41@6354.33,-1388.06 6354.33,-1395.94 6359.25,-1400.86 6369.09,-1391.02 6369.09,-1384.13 6361.22,-1376.25 J4.41@6358.79,-1376.25
CLK3-5_N: J4.45
CLK3-5_P: J4.44 | length 49.2
  Top Layer w4.92: J4.44@6354.33,-1476.65 6354.33,-1484.52 6359.25,-1489.44 6369.09,-1479.6 6369.09,-1472.71 6361.22,-1464.83 J4.44@6358.79,-1464.83
CLK3-6_N: J4.48
CLK3-6_P: J4.47 | length 49.2
  Top Layer w4.92: J4.47@6354.33,-1565.23 6354.33,-1573.1 6359.25,-1578.02 6369.09,-1568.18 6369.09,-1561.29 6361.22,-1553.42 J4.47@6358.79,-1553.42
CLK3-7_N: J4.138 | length 49.2
  Bottom Layer w4.92: J4.138 6521.65,-1159.45 6526.57,-1164.37 6536.42,-1154.53 6536.42,-1147.64 6528.54,-1139.76 J4.138@6526.11,-1139.76
CLK3-7_P: J4.139
CLK3-8_N: J4.135 | length 49.2
  Bottom Layer w4.92: J4.135 6521.65,-1248.03 6526.57,-1252.95 6536.42,-1243.11 6536.42,-1236.22 6528.54,-1228.35 J4.135@6526.11,-1228.35
CLK3-8_P: J4.136
CLK3-9_N: J4.132 | length 49.2
  Bottom Layer w4.92: J4.132 6521.65,-1336.61 6526.57,-1341.54 6536.42,-1331.69 6536.42,-1324.8 6528.54,-1316.93 J4.132@6526.11,-1316.93
CLK3-9_P: J4.133
CLK3-10_N: J4.129 | length 49.2
  Bottom Layer w4.92: J4.129 6521.65,-1425.2 6526.57,-1430.12 6536.42,-1420.28 6536.42,-1413.39 6528.54,-1405.51 J4.129@6526.11,-1405.51
CLK3-10_P: J4.130
CLK3-11_N: J4.126 | length 49.2
  Bottom Layer w4.92: J4.126 6521.65,-1513.78 6526.57,-1518.7 6536.42,-1508.86 6536.42,-1501.97 6528.54,-1494.09 J4.126@6526.11,-1494.09
CLK3-11_P: J4.127
CLK3-12_N: J4.123 | length 49.2
  Bottom Layer w4.92: J4.123 6521.65,-1602.36 6526.57,-1607.28 6536.42,-1597.44 6536.42,-1590.55 6528.54,-1582.68 J4.123@6526.11,-1582.68
CLK3-12_P: J4.124
CLK3-RX_N: J4.162 | length 49.2
  Bottom Layer w4.92: J4.162 6521.65,-450.79 6526.57,-455.71 6536.42,-445.87 6536.42,-438.98 6528.54,-431.1 J4.162@6526.11,-431.1
CLK3-RX_P: J4.163
CLK3-TX_N: J4.9
CLK3-TX_P: J4.8 | length 49.2
  Bottom Layer w4.92: J4.8@6354.33,-413.65 6354.33,-421.53 6359.25,-426.45 6369.09,-416.61 6369.09,-409.72 6361.22,-401.84 J4.8@6358.79,-401.84
EXPANSION3: J6.18
EXTREF1_N: J5.15
EXTREF1_P: J5.13
EXTREF2_N: J5.17
EXTREF2_P: J5.18
GND: J4.1 J4.4 J4.7 J4.10 J4.13 J4.16 J4.19 J4.22 J4.25 J4.28 J4.31 J4.34 J4.37 J4.40 J4.43 J4.46 J4.49 J4.52 J4.55 J4.58 J4.61 J4.64 J4.67 J4.70 J4.73 J4.76 J4.79 J4.82 J4.85 J4.86 J4.89 J4.92 J4.95 J4.98 J4.101 J4.104 J4.107 J4.110 J4.113 J4.116 J4.119 J4.122 J4.125 J4.128 J4.131 J4.134 J4.137 J4.140 J4.143 J4.146 J4.149 J4.152 J4.155 J4.158 J4.161 J4.164 J4.167 J4.170 J5.3 J5.4 J5.21 J5.27 J5.28 J6.3 J6.4 J6.17 J6.21 J6.27 J6.28 | length 2044.9
  Top Layer w4.92: J6.17 4927.95,-397.05 4925,-400 ; J6.21 4927.95,-297.05 4925,-300 ; v2(5300,-750) 5217.23,-750 J6.4 5208.99,-741.76 5074.48,-741.76 J6.3 4977.95,-747.05 v2(4975,-750) 4950,-750 4925,-725 4925,-400 ; v2(5300,-150) 5217.23,-150 J6.28 5212.13,-144.9 5071.35,-144.9 J6.27 4952.95,-147.05 4925,-175 4925,-300 ; 4925,-400 4925,-300
  Bottom Layer w4.92: v2(4975,-750) 4977.95,-747.05 J5.3 ; v2(4975,-300) 4977.95,-297.05 J5.21 ; v2(4975,-150) 4977.95,-147.05 J5.27 ; J5.4 5297.05,-747.05 v2(5300,-750) ; J5.28 5297.05,-147.05 v2(5300,-150)
INT_HUB: J5.2 J6.2 | length 166.3
  Top Layer w4.92: J6.2 5297.05,-797.05 v2(5300,-800)
  Bottom Layer w4.92: J5.2 5224.8,-800 v2(5300,-800)
MISO: J5.20 J6.20 | length 166.3
  Top Layer w5: J6.20 5297.05,-347.05 v1(5300,-350)
  Bottom Layer w5: J5.20 5224.8,-350 v1(5300,-350)
MOSI: J5.19 J6.19 | length 183.3
  Top Layer w5: v1(4975,-350) 4977.95,-347.05 J6.19
  Bottom Layer w5: v1(4975,-350) 4977.95,-347.05 J5.19
NRESET_CLK-PCB: J5.24 J6.24 | length 166.3
  Top Layer w5: J6.24 5297.05,-247.05 v1(5300,-250)
  Bottom Layer w5: J5.24 5224.8,-250 v1(5300,-250)
NRESET_HUB-PCB: J5.26 J6.26 | length 166.3
  Top Layer w5: J6.26 5217.23,-200 v1(5300,-200)
  Bottom Layer w5: J5.26 5297.05,-197.05 v1(5300,-200)
PCIECLK_OLD_N: J6.15
PCIECLK_OLD_P: J6.13
PWR: J5.9 J5.10 J5.11 J5.12 J6.9 J6.10 J6.11 J6.12
  other v1: 5193.74,-572.88 5221.94,-572.88 5249.54,-572.88 5033.93,-571.21 5061.53,-571.21 5089.73,-571.21
  other v3: 4980.94,-572.08
RXFB-1_N: J4.156
RXFB-1_P: J4.157
RXFB-2_N: J4.153
RXFB-2_P: J4.154
RXFB-3_N: J4.150
RXFB-3_P: J4.151
RXFB-4_N: J4.147
RXFB-4_P: J4.148
RXFB-5_N: J4.144
RXFB-5_P: J4.145
RXFB-6_N: J4.141
RXFB-6_P: J4.142
SCL: J5.23 J6.23 | length 183.3
  Top Layer w5: v1(4975,-250) 4977.95,-247.05 J6.23
  Bottom Layer w5: v1(4975,-250) 4977.95,-247.05 J5.23
SDA: J5.25 J6.25 | length 183.3
  Top Layer w5: v2(4975,-200) 4977.95,-197.05 J6.25
  Bottom Layer w5: v2(4975,-200) 4977.95,-197.05 J5.25
SPICLK: J5.16 J6.16 | length 166.3
  Top Layer w5: J6.16 5217.23,-450 v1(5300,-450)
  Bottom Layer w5: J5.16 5297.05,-447.05 v1(5300,-450)
TXFB-1_N: J4.15
TXFB-1_P: J4.14
TXFB-2_N: J4.18
TXFB-2_P: J4.17
TXFB-3_N: J4.21
TXFB-3_P: J4.20
TXFB-4_N: J4.24
TXFB-4_P: J4.23
TXFB-5_N: J4.27
TXFB-5_P: J4.26
TXFB-6_N: J4.30
TXFB-6_P: J4.29
pads on no net: B1.1 FTG5.FTG2 FTG6.1 FTG7.1 FTG8.1 J4.2 J4.3 J4.5 J4.6 J4.165 J4.166 J4.168 J4.169 J4.171 J4.172 J5.29 J5.30

## Polygon pours and split planes (outlines as drawn)
GND on Top Layer "Top Overlay-No Net" (solid, remove dead copper, pour order 0): 4300,-50 4325,-75 6675,-75 6675,-2825 6650,-2800 4325,-2800
GND on Bottom Layer "Top Overlay-No Net" (solid, remove dead copper, pour order 2): 4300,-75 6650,-75 6675,-50 6675,-2800 4300,-2800
GND on InternalPlane1 (split plane): 6657.07,-2806.68 6463.01,-2806.68 6463.01,-2775.59 6462.99,-2775.37 6462.66,-2767.84 6461.65,-2760.14 6459.97,-2752.56 6457.63,-2745.16 6454.66,-2737.99 6451.08,-2731.1 6446.91,-2724.55 6442.18,-2718.39 6436.94,-2712.67 6431.21,-2707.43 6425.05,-2702.7 6418.51,-2698.53 6411.62,-2694.95 6404.45,-2691.97 6397.05,-2689.64 6389.47,-2687.96 6381.77,-2686.95 6374.24,-2686.62 6374.02,-2686.6 6267.72,-2686.6 6267.5,-2686.62 6259.96,-2686.95 6252.26,-2687.96 6244.69,-2689.64 6237.28,-2691.97 6230.11,-2694.95 6223.23,-2698.53 6216.68,-2702.7 6210.52,-2707.43 6204.8,-2712.67 6199.55,-2718.39 6194.83,-2724.55 6190.66,-2731.1 6187.07,-2737.99 6184.1,-2745.16 6181.77,-2752.56 6180.09,-2760.14 6179.07,-2767.84 6178.74,-2775.37 6178.72,-2775.59 6178.72,-2795.78 4528.54,-2795.78 4528.54,-2806.67 4335.06,-2806.67 4335.06,-87.03 4531.5,-87.03 4531.5,-98.98 6178.73,-98.98 6178.72,-118.11 6178.74,-118.32 6179.07,-125.87 6180.09,-133.56 6181.77,-141.14 6184.1,-148.54 6187.07,-155.72 6190.66,-162.6 6194.83,-169.15 6199.55,-175.31 6204.8,-181.03 6210.52,-186.27 6216.68,-191 6223.23,-195.17 6230.11,-198.76 6237.28,-201.73 6244.69,-204.06 6252.26,-205.74 6259.96,-206.75 6267.5,-207.08 6267.72,-207.1 6374.02,-207.1 6374.24,-207.08 6381.77,-206.75 6389.47,-205.74 6397.05,-204.06 6404.45,-201.73 6411.62,-198.76 6418.51,-195.17 6425.05,-191 6431.21,-186.27 6436.94,-181.03 6442.18,-175.31 6446.91,-169.15 6451.08,-162.6 6454.66,-155.72 6457.63,-148.54 6459.97,-141.14 6461.65,-133.56 6462.66,-125.87 6462.99,-118.33 6463.01,-118.11 6463.01,-87.03 6657.07,-87.03
GND on InternalPlane4 (split plane): 6657.07,-2806.68 6463.01,-2806.68 6463.01,-2775.59 6462.99,-2775.37 6462.66,-2767.84 6461.65,-2760.14 6459.97,-2752.56 6457.63,-2745.16 6454.66,-2737.99 6451.08,-2731.1 6446.91,-2724.55 6442.18,-2718.39 6436.94,-2712.67 6431.21,-2707.43 6425.05,-2702.7 6418.51,-2698.53 6411.62,-2694.95 6404.45,-2691.97 6397.05,-2689.64 6389.47,-2687.96 6381.77,-2686.95 6374.24,-2686.62 6374.02,-2686.6 6267.72,-2686.6 6267.5,-2686.62 6259.96,-2686.95 6252.26,-2687.96 6244.69,-2689.64 6237.28,-2691.97 6230.11,-2694.95 6223.23,-2698.53 6216.68,-2702.7 6210.52,-2707.43 6204.8,-2712.67 6199.55,-2718.39 6194.83,-2724.55 6190.66,-2731.1 6187.07,-2737.99 6184.1,-2745.16 6181.77,-2752.56 6180.09,-2760.14 6179.07,-2767.84 6178.74,-2775.37 6178.72,-2775.59 6178.72,-2795.78 4526.57,-2795.78 4526.57,-2806.67 4335.06,-2806.67 4335.06,-87.03 4532.48,-87.03 4532.48,-97.08 6178.73,-97.08 6178.72,-118.11 6178.74,-118.32 6179.07,-125.87 6180.09,-133.56 6181.77,-141.14 6184.1,-148.54 6187.07,-155.72 6190.66,-162.6 6194.83,-169.15 6199.55,-175.31 6204.8,-181.03 6210.52,-186.27 6216.68,-191 6223.23,-195.17 6230.11,-198.76 6237.28,-201.73 6244.69,-204.06 6252.26,-205.74 6259.96,-206.75 6267.5,-207.08 6267.72,-207.1 6374.02,-207.1 6374.24,-207.08 6381.77,-206.75 6389.47,-205.74 6397.05,-204.06 6404.45,-201.73 6411.62,-198.76 6418.51,-195.17 6425.05,-191 6431.21,-186.27 6436.94,-181.03 6442.18,-175.31 6446.91,-169.15 6451.08,-162.6 6454.66,-155.72 6457.63,-148.54 6459.97,-141.14 6461.65,-133.56 6462.66,-125.87 6462.99,-118.33 6463.01,-118.11 6463.01,-87.03 6657.07,-87.03

## Keep-outs
Keep-Out Layer:
  circle w3.94: c5141.73,-772.05 r20.08
  lines w3.94: 6176.77,-96.46 6176.77,-146.85 6231.5,-201.57 6407.48,-201.57 ; 6179.53,-96.46 4368.11,-96.46 4346.46,-118.11 4346.46,-221.89 4333.66,-234.68 4333.66,-248.52 4333.66,-359.25 4333.66,-465.55 4346.46,-478.35 4346.46,-2774.61 4369.09,-2797.24 4536.02,-2797.24 5637.8,-2797.24 5662.4,-2797.24 6163.18,-2797.24 6163.34,-2797.08 6163.34,-2757.13 6227.17,-2693.31 6419.29,-2693.31 6425.98,-2700
  lines w4: 6407.48,-201.57 6427.95,-181.1 6427.95,-172.05 6525,-75 6650,-75 6675,-100 6675,-212.4 6675,-2700 6675,-2750 6626.97,-2798.03 6624.16,-2798.03 6494.69,-2798.03 6449.02,-2752.36 6449.02,-2723.03 6425.98,-2700

## Other copper
Top Layer:
  rectangle net PWR: 4956.69,-618.28 5316.93,-527.08
Bottom Layer:
  rectangle net PWR: 5106.74,-546.68 5181.34,-527.78
  rectangle net PWR: 5106.74,-618.28 5182.34,-600.88
  region net PWR: 5118.53,-527.78 4954.94,-527.78 4954.94,-618.05 5118.53,-618.05
  rectangle net PWR: 5106.3,-618.68 5278.54,-527.78
InternalPlane1 (plane layer: these items are gaps in the copper):
  rectangle: 4531.5,-98.98 6191.93,-58.28
  rectangle: 4528.54,-2826.88 6188.98,-2795.78
  lines w20: 4952.01,-2826.77 4952.44,-2826.34 ; 5141.64,-68.13 5142.84,-66.93 ; 5436.64,-2826.32 5437.09,-2826.77
  text ".Layer_Name" at 4328.2,-2873.1 h35
InternalPlane4 (plane layer: these items are gaps in the copper):
  rectangle: 4532.48,-97.08 6198.82,-61.58
  rectangle: 4526.57,-2824.98 6195.87,-2795.78

## Silkscreen, mask and mechanical layers (free items; w line width, h text height)
Top Overlay:
  drawing of 1216 lines, arcs and shapes, not listed
  text "PCB MCH Mordovia rev1.0" at 4525,-1125 h59.06
Bottom Overlay:
  drawing of 1216 lines, arcs and shapes, not listed
  text "PCB MCH Mordovia rev1.0" at 5825,-1225 h59.06
Mechanical 1:
  the board outline again, w3.94

## Text inside footprints (layer, text, board x,y; h text height)
J4: Mechanical 8 "PCB Edge" at 6761.81,-1630.91 h60 r90; Mechanical 8 "83" at 6348.27,-2619.25 h19.69 r90; Mechanical 8 "84" at 6397.87,-2648.67 h19.69 r90; Mechanical 8 "85" at 6457.38,-2679.46 h19.69 r90; Mechanical 8 "82" at 6456.94,-2589.83 h19.69 r90; Mechanical 8 "87" at 6515.99,-2647.12 h19.69 r90; Mechanical 8 "88" at 6564.06,-2616.67 h19.69 r90; Mechanical 8 "89" at 6623.63,-2587.09 h19.69 r90; Mechanical 8 "86" at 6622.04,-2674.68 h19.69 r90; Mechanical 8 "2" at 6347.49,-223.74 h19.69 r90; Mechanical 8 "3" at 6398.41,-255.13 h19.69 r90; Mechanical 8 "1" at 6456.57,-196.89 h19.69 r90; Mechanical 8 "4" at 6457.46,-284.66 h19.69 r90; Mechanical 8 "168" at 6514.78,-254.13 h19.69 r90; Mechanical 8 "169" at 6564.83,-224.23 h19.69 r90; Mechanical 8 "167" at 6623.16,-284.59 h19.69 r90; Mechanical 8 "170" at 6621.06,-198.63 h19.69 r90